# Altium PCB PCB.PcbDoc (part 2 of 3)
Units mm, origin at the board's own origin, x right, y up, seen from the top; angles counter-clockwise.
Board outline 116.97 x 81.03 mm, 4 copper layers (Top Layer, Int1 (GND), Int2 (PWR), Bottom Layer), stack 1.369 mm thick; 124 components, 94 nets, 431 pads, 1026 vias.
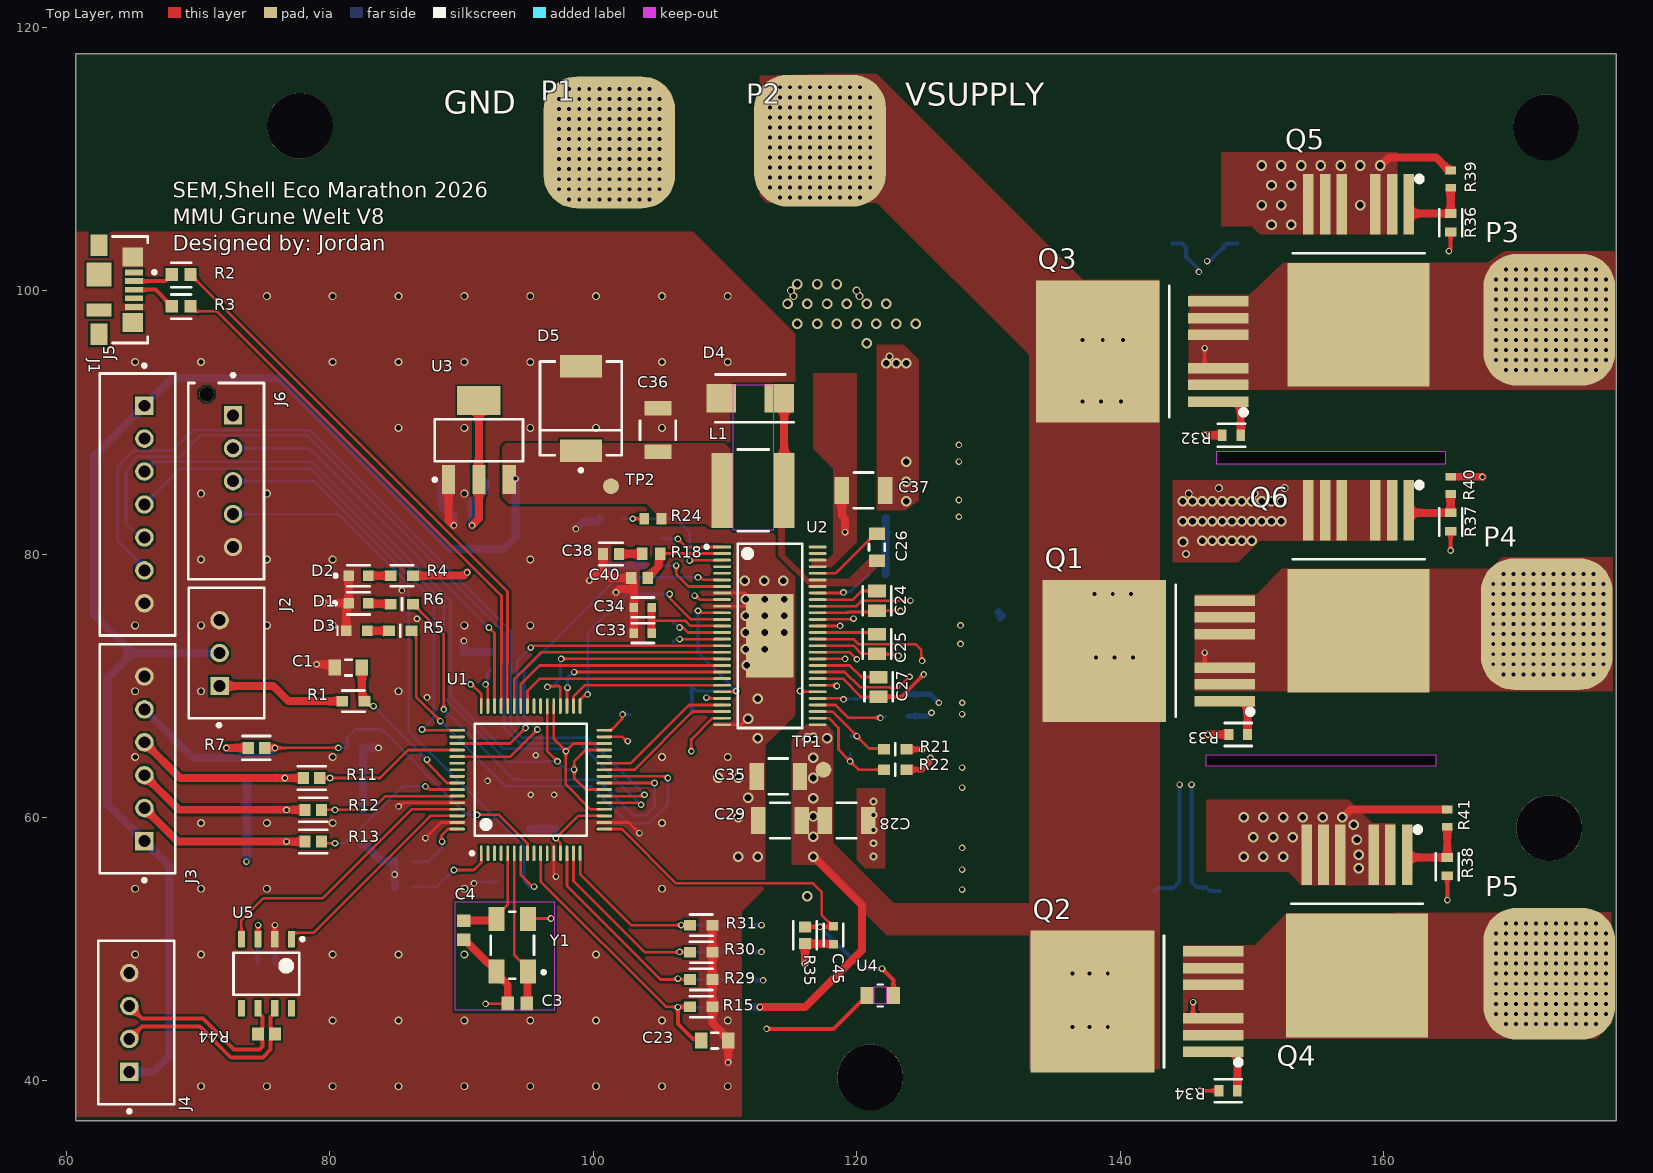
[diagram p0: Top Layer view]

## Part data (continued)
U5: library part CMP-0315-00073-2, "3.3 V CAN Transceiver, 17 mA, -40 to 85 degC, 8-pin SOIC (D), Green (RoHS & no Sb/Br)", Drivers Per Package=1, Manufacturer="Texas Instruments", Rating=Catalog, Supply Voltage(s)(V)=3.3, Code_JEDEC=MS-012AA, ComponentLink1Description=Datasheet, ComponentLink1URL=http://www.ti.com/general/docs/lit/getliterature.tsp?genericPartNumber=SN65HVD232&fileType=pdf, DatasheetVersion=SLOS346K, Eco-Plan="Green (RoHS & no Sb/Br)", ICC(Max)(mA)=17, Isolated=No, Mounting Technology="Surface Mount", PackageDescription="8-Pin Plastic Small Outline Integrated Circuit, 4.9 x 3.9 mm, Pitch 1.27 mm Pitch", PackageReference=D0008A, PackageVersion="revM, Jun-2011", PartNumber=SN65HVD232D, Receivers Per Package=1, SubFamily=CAN, Transient Pulse Protection(V)="-25 to 25"
Y1: library part CMP-2000-05730-2, "Crystal 8MHz ±10ppm 10pF SMD-4 5mm x 3.2mm", Case/Package=SMD/SMT, ESR (Equivalent Series Resistance)=200R, Frequency=8MHz, Frequency Stability=10ppm, Load Capacitance=10pF, Max Operating Temperature=60°C, Min Operating Temperature=-10°C, Depth=3.2mm, Frequency Tolerance=10ppm, Height=0.043inch, Height - Seated (Max)=0.043inch, Lead Free="Lead Free", Length=0.197inch, Mount="Surface Mount", Number of Pins=4, Packaging="Tape and Reel", REACH SVHC="No SVHC", RoHS Compliant=Yes, Series=ABM3B, Series Resistance=200R, Width=0.126inch

## Free pads (board coordinates)
  round 5 hole 5 paste-2539.97 mask+0.102: P?1(77.724,112.522) P?2(121.031,40.259) P?3(172.339,112.395) P?4(172.593,59.182)

## Via types
v1: diameter 0.5, hole 0.3, Top Layer to Bottom Layer, 784 vias
v2: diameter 0.8/0.8/0.8/0.8 (per signal layer), hole 0.5, Top Layer to Bottom Layer, 130 vias
v3: diameter 0.6, hole 0.4, Top Layer to Bottom Layer, 82 vias
v4: diameter 0.6, hole 0.3, Top Layer to Bottom Layer, 23 vias
v5: diameter 0.8, hole 0.5, Top Layer to Bottom Layer, 7 vias

## Nets (pads, with @x,y where several pads share a name; then routed paths per layer and width w, separated by ;. In a path a pad name is that pad's centre, name@x,y a point inside that pad or via, vN(x,y) a via of type N, cw(c..) or ccw(c..) an arc to the next point about the centre after c; other vN are vias at no path point)
+5: C36.1 D5.1 J2.2 J3.1 J4.1 J5.1 L1.2 R24.2 TP2.TP? U3.3 | length 104.3
  Bottom Layer w0.6: J4.1@64.77,40.68 66.588,40.68 67.818,41.91 67.818,56.301 J3.1@65.913,58.206 63.119,61 63.119,70.612 64.984,72.477 ; J2.2@71.628,72.477 64.984,72.477 ; v1(94.107,85.725) 94.107,81.28 93.218,80.391 89.154,80.391 76.2,93.345 67.997,93.345 J5.1@65.913,91.261 62.103,87.451 62.103,75.358 64.984,72.477
CAN_N: J4.3 R44.2 U5.6 | length 14.9
  Top Layer w0.3: J4.3@64.77,45.68 65.72,44.73 70.373,44.73 72.72,42.383 74.656,42.383 74.884,42.611 74.884,43.035 74.834,43.085 74.834,43.261 R44.2@74.534,43.561 74.834,43.861 74.834,44.037 74.884,44.087 74.884,44.857 74.708,45.033 74.674,45.033 74.549,45.158 U5.6@74.549,45.508
CAN_P: J4.2 R44.1 U5.7 | length 16
  Top Layer w0.3: J4.2@64.77,43.18 65.72,44.13 70.125,44.13 72.472,41.783 74.905,41.783 75.484,42.362 75.484,43.035 75.534,43.085 75.534,43.642 R44.1@75.643,43.752 ; U5.7@75.819,45.508 75.819,45.158 75.694,45.033 75.66,45.033 75.484,44.857 75.484,44.087 75.534,44.037 75.534,43.861 R44.1@75.643,43.752 ; R44.1@75.834,43.561 R44.1@75.643,43.752
CURR_1_N: R22.1 R42.3 | length 54.9
  Top Layer w0.4: R22.1@123.786,63.627 125.007,63.627 125.544,64.164 125.544,64.43 125.603,64.489 v1(125.603,64.516)
  Int2 (PWR) w0.3: v1(125.603,64.516) 125.641,64.554 125.783,64.554 125.827,64.598 127.358,64.598 132.08,69.321 132.08,92.329 141.187,101.436 145.972,101.436 v1(145.981,101.427)
  Bottom Layer w0.3: R42.3@143.951,103.562 144.726,103.562 145.021,103.267 145.021,102.56 145.881,101.7 145.881,101.618 145.981,101.518 v1(145.981,101.427)
CURR_1_P: R21.1 R42.4 | length 54.7
  Top Layer w0.4: R21.1@123.786,65.181 123.8,65.167 124.952,65.167 v1(124.967,65.152)
  Int2 (PWR) w0.3: v1(124.967,65.152) 127.128,65.152 131.526,69.55 131.526,92.683 133.411,94.568 141.18,102.336 146.344,102.336 146.406,102.275 146.579,102.275 v1(146.617,102.236)
  Bottom Layer w0.3: v1(146.617,102.236) 146.656,102.275 146.849,102.275 148.136,103.562 R42.4@148.911,103.562
CURR_2_N: R19.1 R43.3 | length 33
  Int1 (GND) w0.3: v1(125.684,67.949) 125.704,67.949 129.4,64.252 143.465,64.252 144.526,63.191 v1(144.526,62.484)
  Bottom Layer w0.3: R43.3@142.614,54.412 142.852,54.65 144.058,54.65 144.526,55.118 v1(144.526,62.484)
  Bottom Layer w0.4: R19.1@123.913,67.691 125.399,67.691 125.657,67.949 v1(125.684,67.949)
CURR_2_P: R16.1 R43.4 | length 34.8
  Int1 (GND) w0.3: v1(126.238,68.707) 126.238,68.687 129.773,65.152 143.838,65.152 145.426,63.564 v1(145.426,62.484)
  Bottom Layer w0.3: v1(145.426,62.484) 145.426,55.096 145.815,54.707 146.504,54.707 146.799,54.412 R43.4@147.574,54.412
  Bottom Layer w0.4: R16.1@123.913,69.342 125.603,69.342 v1(126.238,68.707)
H1_LOW: Q5.2 Q5.3 Q5.5 Q5.6 Q5.7 R39.2 R40.1 R42.2 U2.44 | length 115.1
  Top Layer w0.2: U2.44@117.036,74.537 117.038,74.538 v1(118.745,74.539) v1(118.745,74.539)
  Top Layer w0.6: v2(159.75,109.5) 159.804,109.5 160.413,110.109 163.999,110.109 165,109.108 R39.2@165.1,109.108 ; R40.1@165.1,85.867 167.498,85.867 v1(167.513,85.852)
  Int1 (GND) w0.3: v1(118.745,74.539) 118.745,75.565 124.841,81.661 124.841,91.059 137.541,103.759 150.259,103.759 v2(151.5,105) ; v1@118.745,74.549 123.317,74.549 134.62,85.852 v1(167.513,85.852)
  other v2: 153,105 150.75,106.5 152.25,106.5 158.25,106.5 151.5,108 153,108 150.75,109.5 152.25,109.5 153.75,109.5 155.25,109.5 156.75,109.5 158.25,109.5
H1_VS: C24.2 P3.P? Q3.2 Q3.3 Q3.5 Q3.6 Q3.7 Q5.8 R26.2 U2.46 | length 75.1
  Top Layer w0.2: U2.46@117.036,75.537 119.258,75.537 119.32,75.599 121.446,75.599 C24.2@121.539,75.692 v1(123.317,75.692)
  Top Layer w0.3: v1(146.431,95.631) 146.431,94.357 146.681,94.107 Q3.3@147.453,94.107
  Int1 (GND) w0.3: v1(123.317,75.692) 123.317,77.089 136.017,89.789 143.383,89.789 144.272,90.678 144.272,93.472 v1(146.431,95.631)
  Int2 (PWR) w0.3: v1(112.776,51.816) 113.284,52.324 113.284,71.374 117.84,75.93 123.041,75.93 123.279,75.692 v1(123.317,75.692)
  Bottom Layer w0.3: R26.2@112.029,51.816 v1(112.776,51.816)
  other v1: 169.291,93.98 170.053,93.98 170.815,93.98 171.577,93.98 172.339,93.98 173.101,93.98 173.863,93.98 174.625,93.98 175.387,93.98 176.149,93.98 168.529,94.742 169.291,94.742 170.053,94.742 170.815,94.742 171.577,94.742 172.339,94.742 173.101,94.742 173.863,94.742 174.625,94.742 175.387,94.742 176.149,94.742 176.911,94.742 168.529,95.504 169.291,95.504 170.053,95.504 170.815,95.504 171.577,95.504 172.339,95.504 173.101,95.504 173.863,95.504 174.625,95.504 175.387,95.504 176.149,95.504 176.911,95.504 168.529,96.266 169.291,96.266 170.053,96.266 170.815,96.266 171.577,96.266 172.339,96.266 173.101,96.266 173.863,96.266 174.625,96.266 175.387,96.266 176.149,96.266 176.911,96.266 168.529,97.028 169.291,97.028 170.053,97.028 170.815,97.028 171.577,97.028 172.339,97.028 173.101,97.028 173.863,97.028 174.625,97.028 175.387,97.028 176.149,97.028 176.911,97.028 168.529,97.79 169.291,97.79 170.053,97.79 170.815,97.79 171.577,97.79 172.339,97.79 173.101,97.79 173.863,97.79 174.625,97.79 175.387,97.79 176.149,97.79 176.911,97.79 168.529,98.552 169.291,98.552 170.053,98.552 170.815,98.552 171.577,98.552 172.339,98.552 173.101,98.552 173.863,98.552 174.625,98.552 175.387,98.552 176.149,98.552 176.911,98.552 168.529,99.314 169.291,99.314 170.053,99.314 170.815,99.314 171.577,99.314 172.339,99.314 173.101,99.314 173.863,99.314 174.625,99.314 175.387,99.314 176.149,99.314 176.911,99.314 168.529,100.076 169.291,100.076 170.053,100.076 170.815,100.076 171.577,100.076 172.339,100.076 173.101,100.076 173.863,100.076 174.625,100.076 175.387,100.076 176.149,100.076 176.911,100.076 168.529,100.838 169.291,100.838 170.053,100.838 170.815,100.838 171.577,100.838 172.339,100.838 173.101,100.838 173.863,100.838 174.625,100.838 175.387,100.838 176.149,100.838 176.911,100.838 169.291,101.6 170.053,101.6 170.815,101.6 171.577,101.6 172.339,101.6 173.101,101.6 173.863,101.6 174.625,101.6 175.387,101.6 176.149,101.6